# Altium PCB T1_MODIFYV1_0527.PCBDOC (part 4 of 6)
Units mm, origin at the board's own origin, x right, y up, seen from the top; angles counter-clockwise.
Board outline 1320.8 x 844.04 mm, 2 copper layers (Top Layer, Bottom Layer); 219 components, 215 nets, 1393 pads, 492 vias.
Unrouted connection lines stored in the file: 60.
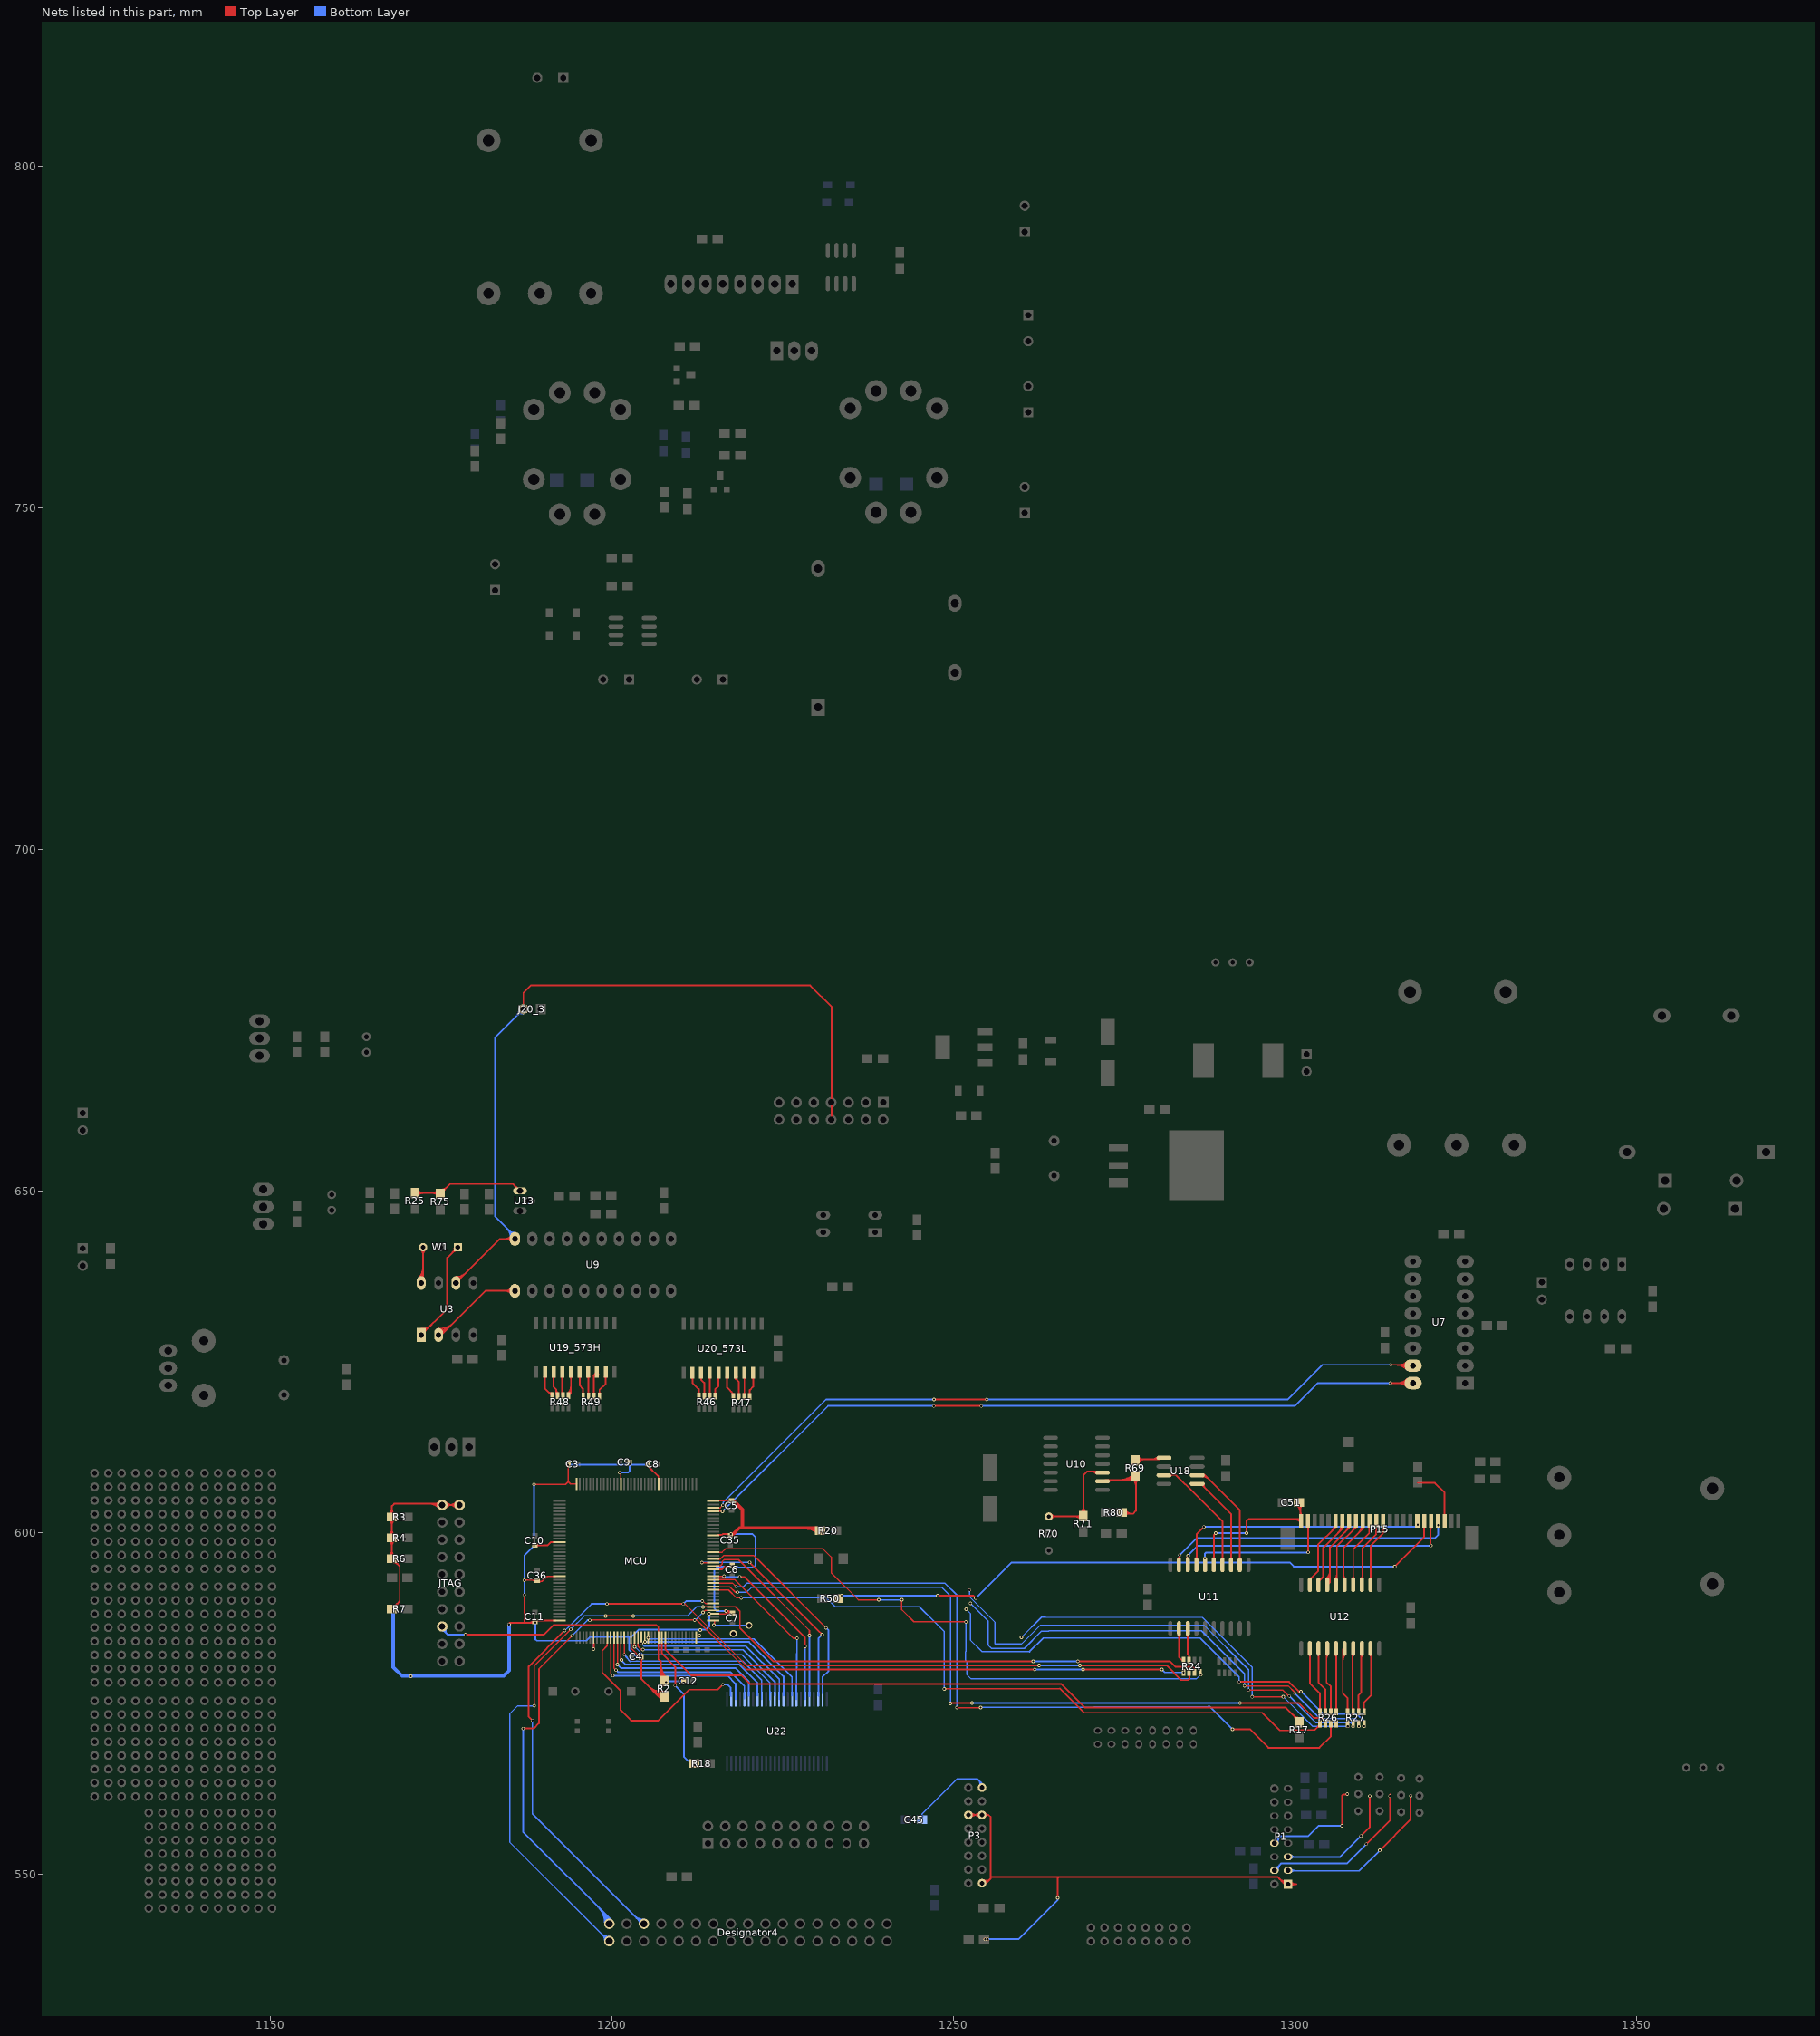
[diagram p4: the nets of this part, all layers, seen from the top]

## Via types
v1: diameter 0.5, hole 0.3, Top Layer to Bottom Layer, 470 vias
v2: diameter 0.8, hole 0.5, Top Layer to Bottom Layer, 12 vias
v3: diameter 3, hole 1.5, Top Layer to Bottom Layer, 4 vias
v4: diameter 3, hole 3, Top Layer to Bottom Layer, 4 vias
v5: diameter 1, hole 0.7, Top Layer to Bottom Layer, 2 vias

## Nets (pads, with @x,y where several pads share a name; then routed paths per layer and width w, separated by ;. In a path a pad name is that pad's centre, name@x,y a point inside that pad or via, vN(x,y) a via of type N, cw(c..) or ccw(c..) an arc to the next point about the centre after c; other vN are vias at no path point) (continued)
NetR24_7: R24.7 U11.3 | length 6
  Top Layer w0.254: U11.3@1284.127,585.13 cw(c1283.862,584.864) 1284.237,584.864 ; 1284.237,584.804 cw(c1284.697,584.804) U11.3@1284.372,585.13 ; U11.3@1284.237,586.154 1284.237,582.236 1284.453,582.02 R24.7@1284.453,581.355 ; R24.7@1284.366,581.692 ccw(c1284.156,581.902) 1284.453,581.902 ccw(c1284.75,581.902) R24.7@1284.54,581.692
NetR24_8: R24.8 U11.2 | length 6
  Top Layer w0.254: U11.2@1282.857,585.13 cw(c1282.592,584.864) 1282.967,584.864 ; 1282.967,584.804 cw(c1283.427,584.804) U11.2@1283.102,585.13 ; U11.2@1282.967,586.154 1282.967,581.838 R24.8@1283.704,581.101
NetR25_2: R25.2 R75.1 U13.1 | length 24.3
  Top Layer w0.254: R25.2@1171.143,649.757 R75.1@1174.699,649.757 ; R25.2@1171.502,649.398 cw(c1172.37,648.531) 1172.37,649.757 cw(c1172.37,650.984) R25.2@1171.502,650.117 ; R75.1@1174.467,649.398 ccw(c1173.6,648.531) 1173.6,649.757 ccw(c1173.6,650.984) R75.1@1174.467,650.117 ; R75.1@1174.826,649.63 1176.274,651.078 1185.491,651.078 U13.1@1186.485,650.084 ; R75.1@1174.826,650.011 ccw(c1174.826,650.931) 1175.477,650.281 ; R75.1@1174.826,650.265 ccw(c1174.826,651.798) 1175.91,650.714 ; R75.1@1175.334,649.757 cw(c1176.254,649.757) 1175.604,650.408 ; 1185.588,650.981 cw(c1184.88,650.273) U13.1@1185.867,650.104 ; 1185.936,650.633 cw(c1185.474,650.171) U13.1@1186.118,650.062
NetR26_5: R26.5 U12.5 | length 9.7
  Top Layer w0.254: U12.5@1305.819,582.209 cw(c1305.462,581.852) 1305.966,581.852 ; R26.5@1305.966,573.875 U12.5@1305.966,582.625 ; 1305.966,574.475 ccw(c1306.392,574.475) R26.5@1306.091,574.174 ; 1305.966,581.975 cw(c1306.297,581.975) U12.5@1306.063,582.209
NetR26_6: R26.6 U12.4 | length 10.1
  Top Layer w0.254: 1304.569,581.668 cw(c1305.334,581.668) U12.4@1304.793,582.209 ; U12.4@1304.569,582.651 1304.569,578.155 1305.204,577.52 R26.6@1305.204,573.837 ; R26.6@1305.117,574.174 ccw(c1304.907,574.384) 1305.204,574.384 ccw(c1305.501,574.384) R26.6@1305.291,574.174
NetR26_7: R26.7 U12.3 | length 10
  Top Layer w0.254: U12.3@1303.279,582.209 cw(c1302.983,581.913) 1303.401,581.913 ; 1303.401,581.913 cw(c1303.819,581.913) U12.3@1303.523,582.209 ; U12.3@1303.401,582.473 1303.401,578.104 1304.392,577.113 R26.7@1304.392,574.04 ; R26.7@1304.317,574.174 ccw(c1304.138,574.353) 1304.392,574.353 ; 1304.392,574.414 ccw(c1304.732,574.414) R26.7@1304.491,574.174
NetR26_8: R26.8 U12.2 | length 10.4
  Top Layer w0.254: U12.2@1302.009,582.209 cw(c1301.713,581.913) 1302.131,581.913 ; 1302.131,581.913 cw(c1302.549,581.913) U12.2@1302.253,582.209 ; U12.2@1302.131,582.524 1302.131,578.028 1303.604,576.555 R26.8@1303.604,573.837 ; R26.8@1303.517,574.174 ccw(c1303.307,574.384) 1303.604,574.384 ccw(c1303.901,574.384) R26.8@1303.691,574.174
NetR27_5: R27.5 U12.9 | length 10
  Top Layer w0.254: R27.5@1309.981,574.174 ccw(c1309.801,574.354) 1310.056,574.354 ; R27.5@1310.056,574.04 1310.056,575.183 1311.097,576.224 U12.9@1311.097,582.625 ; 1310.056,574.414 ccw(c1310.395,574.414) R27.5@1310.155,574.174 ; U12.9@1310.899,582.209 cw(c1310.419,581.729) 1311.097,581.729
NetR27_6: R27.6 U12.8 | length 10.3
  Top Layer w0.254: R27.6@1309.181,574.174 ccw(c1308.971,574.384) 1309.268,574.384 ccw(c1309.565,574.384) R27.6@1309.355,574.174 ; R27.6@1309.268,573.837 1309.268,576.275 1309.649,576.656 U12.8@1309.649,582.93 ; 1309.649,581.668 cw(c1310.414,581.668) U12.8@1309.873,582.209
NetR27_7: R27.7 U12.7 | length 9.9
  Top Layer w0.254: R27.7@1308.379,573.862 U12.7@1308.379,582.701 ; 1308.379,574.598 ccw(c1308.98,574.598) R27.7@1308.555,574.174 ; 1308.379,581.668 cw(c1309.144,581.668) U12.7@1308.603,582.209
NetR27_8: R27.8 U12.6 | length 11.5
  Top Layer w0.254: 1306.957,581.3 cw(c1308.242,581.3) U12.6@1307.333,582.209 ; 1306.957,581.913 cw(c1307.629,581.913) U12.6@1307.154,582.388 ; U12.6@1306.957,582.527 cw(c1307.015,582.527) U12.6@1306.974,582.568 ; U12.6@1306.957,583.032 1306.957,576.529 1307.668,575.818 R27.8@1307.668,573.837 ; R27.8@1307.581,574.174 ccw(c1307.371,574.384) 1307.668,574.384 ccw(c1307.965,574.384) R27.8@1307.755,574.174
NetR46_5: R46.5 U20_573L.5 | length 4.7
  Top Layer w0.254: R46.5@1214.985,620.376 ccw(c1214.775,620.586) 1215.072,620.586 ccw(c1215.369,620.586) R46.5@1215.159,620.376 ; R46.5@1215.072,620.039 1215.072,621.055 1215.542,621.526 U20_573L.5@1215.542,623.449 ; U20_573L.5@1215.42,622.777 cw(c1215.125,622.482) 1215.542,622.482 cw(c1215.96,622.482) U20_573L.5@1215.665,622.777
NetR46_6: R46.6 U20_573L.4 | length 4.5
  Top Layer w0.254: U20_573L.4@1214.15,622.777 cw(c1213.855,622.482) 1214.272,622.482 cw(c1214.69,622.482) U20_573L.4@1214.395,622.777 ; R46.6@1214.185,620.376 ccw(c1213.975,620.587) 1214.272,620.587 ; R46.6@1214.272,620.039 U20_573L.4@1214.272,623.449 ; 1214.272,620.586 ccw(c1214.569,620.586) R46.6@1214.359,620.376
NetR46_7: R46.7 U20_573L.3 | length 4.7
  Top Layer w0.254: U20_573L.3@1212.88,622.777 cw(c1212.585,622.482) 1213.002,622.482 cw(c1213.42,622.482) U20_573L.3@1213.125,622.777 ; U20_573L.3@1213.002,623.449 1213.002,622.452 1213.472,621.983 R46.7@1213.472,620.039 ; R46.7@1213.385,620.376 ccw(c1213.175,620.586) 1213.472,620.586 ccw(c1213.769,620.586) R46.7@1213.559,620.376
NetR46_8: R46.8 U20_573L.2 | length 4.9
  Top Layer w0.254: U20_573L.2@1211.61,622.777 cw(c1211.315,622.482) 1211.732,622.482 cw(c1212.15,622.482) U20_573L.2@1211.855,622.777 ; U20_573L.2@1211.732,623.449 1211.732,621.995 1212.672,621.055 R46.8@1212.672,620.039 ; R46.8@1212.585,620.376 ccw(c1212.375,620.586) 1212.672,620.586 ccw(c1212.969,620.586) R46.8@1212.759,620.376
NetR47_5: R47.5 U20_573L.9 | length 4.8
  Top Layer w0.254: R47.5@1220.04,620.3 ccw(c1219.83,620.51) 1220.127,620.51 ccw(c1220.424,620.51) R47.5@1220.214,620.3 ; R47.5@1220.127,619.963 1220.127,620.928 1220.622,621.424 U20_573L.9@1220.622,623.449 ; U20_573L.9@1220.5,622.777 cw(c1220.205,622.482) 1220.622,622.482 cw(c1221.04,622.482) U20_573L.9@1220.745,622.777
NetR47_6: R47.6 U20_573L.8 | length 4.4
  Top Layer w0.254: U20_573L.8@1219.23,622.777 cw(c1218.935,622.482) 1219.352,622.482 cw(c1219.77,622.482) U20_573L.8@1219.475,622.777 ; R47.6@1219.24,620.3 ccw(c1218.968,620.572) 1219.352,620.572 ; R47.6@1219.352,619.963 U20_573L.8@1219.352,623.449
NetR47_7: R47.7 U20_573L.7 | length 6.1
  Top Layer w0.254: U20_573L.7@1218.007,622.93 ccw(c1218.329,622.799) 1218.084,622.553 ; U20_573L.7@1218.082,623.449 1218.082,622.554 ; U20_573L.7@1218.243,622.834 ccw(c1218.714,622.642) 1218.354,622.282 ; R47.7@1218.44,620.3 ccw(c1218.23,620.51) 1218.527,620.51 ccw(c1218.824,620.51) R47.7@1218.614,620.3 ; R47.7@1218.527,619.963 1218.527,622.11 1218.082,622.554 ; 1218.082,622.554 ccw(c1217.824,622.554) 1217.979,622.761 cw(c1217.824,622.554) 1218.082,622.554 ; 1218.082,622.554 cw(c1218.341,622.554) 1218.186,622.761 ccw(c1218.341,622.554) 1218.082,622.554
NetR47_8: R47.8 U20_573L.6 | length 4.7
  Top Layer w0.254: U20_573L.6@1216.69,622.777 cw(c1216.395,622.482) 1216.812,622.482 cw(c1217.23,622.482) U20_573L.6@1216.935,622.777 ; U20_573L.6@1216.812,623.449 1216.812,621.284 R47.8@1217.778,620.319 ; 1217.406,620.69 cw(c1216.929,620.213) R47.8@1217.604,620.213
NetR48_5: R48.5 U19_573H.5 | length 6.6
  Top Layer w0.254: R48.5@1193.497,620.427 ccw(c1192.397,621.527) 1193.952,621.527 ; R48.5@1193.584,620.09 1193.952,620.459 ; R48.5@1193.658,620.438 ccw(c1193.793,620.618) 1193.952,620.459 ; R48.5@1193.676,620.248 ccw(c1193.01,620.914) 1193.952,620.914 ; U19_573H.5@1193.83,622.879 cw(c1193.535,622.583) 1193.952,622.583 cw(c1194.37,622.583) U19_573H.5@1194.075,622.879 ; U19_573H.5@1193.952,623.551 1193.952,620.459
NetR48_6: R48.6 U19_573H.4 | length 4.7
  Top Layer w0.254: U19_573H.4@1192.56,622.879 cw(c1192.265,622.583) 1192.682,622.583 cw(c1193.1,622.583) U19_573H.4@1192.805,622.879 ; 1192.682,620.882 ccw(c1193.326,620.882) R48.6@1192.871,620.427 ; U19_573H.4@1192.682,623.551 1192.682,620.192 R48.6@1192.784,620.09
NetR48_7: R48.7 U19_573H.3 | length 5
  Top Layer w0.254: U19_573H.3@1191.29,622.879 cw(c1190.995,622.583) 1191.412,622.583 cw(c1191.83,622.583) U19_573H.3@1191.535,622.879 ; U19_573H.3@1191.412,623.551 1191.412,621.374 1191.815,620.971 ; R48.7@1191.984,620.09 1191.815,620.259 1191.815,620.971 ; R48.7@1192.063,620.434 cw(c1192.52,620.971) 1191.815,620.971
NetR48_8: R48.8 U19_573H.2 | length 5.3
  Top Layer w0.254: U19_573H.2@1190.02,622.879 cw(c1189.725,622.583) 1190.142,622.583 cw(c1190.56,622.583) U19_573H.2@1190.265,622.879 ; U19_573H.2@1190.142,623.551 1190.142,621.132 R48.8@1191.184,620.09 ; 1190.547,620.727 ccw(c1191.184,621.364) R48.8@1191.184,620.463
NetR49_5: R49.5 U19_573H.9 | length 5
  Top Layer w0.254: R49.5@1198.043,620.402 ccw(c1197.833,620.612) 1198.13,620.612 ccw(c1198.427,620.612) R49.5@1198.217,620.402 ; R49.5@1198.13,620.065 1198.13,620.954 1199.032,621.856 U19_573H.9@1199.032,623.551 ; U19_573H.9@1198.91,622.879 cw(c1198.615,622.583) 1199.032,622.583 cw(c1199.45,622.583) U19_573H.9@1199.155,622.879
NetR49_6: R49.6 U19_573H.8 | length 5.2
  Top Layer w0.254: 1197.237,623.025 cw(c1197.547,622.715) U19_573H.8@1197.811,623.066 ; R49.6@1197.305,620.065 1197.305,623.094 U19_573H.8@1197.762,623.551 ; 1197.305,620.673 ccw(c1197.688,620.673) R49.6@1197.417,620.402 ; 1197.444,623.232 cw(c1197.725,622.951) U19_573H.8@1197.964,623.269
NetR49_7: R49.7 U19_573H.7 | length 4.5
  Top Layer w0.254: U19_573H.7@1196.37,622.879 cw(c1196.075,622.583) 1196.492,622.583 cw(c1196.91,622.583) U19_573H.7@1196.615,622.879 ; R49.7@1196.492,620.065 U19_573H.7@1196.492,623.551 ; 1196.492,620.704 ccw(c1196.919,620.704) R49.7@1196.617,620.402
NetR49_8: R49.8 U19_573H.6 | length 4.9
  Top Layer w0.254: U19_573H.6@1195.1,622.879 cw(c1194.805,622.583) 1195.222,622.583 cw(c1195.64,622.583) U19_573H.6@1195.345,622.879 ; U19_573H.6@1195.222,623.551 1195.222,621.614 1195.705,621.132 R49.8@1195.705,619.76 ; 1195.705,620.673 ccw(c1196.089,620.673) R49.8@1195.817,620.402
NetR69_1: R69.1 U18.5 | length 7.6
  Top Layer w0.254: R69.1@1276.756,610.794 1280.211,610.794 U18.5@1280.465,611.048 ; R69.1@1276.784,610.563 cw(c1277.34,610.007) 1277.34,610.794 ; R69.1@1276.963,610.384 cw(c1277.953,609.394) 1277.953,610.794 ; R69.1@1276.963,611.102 ccw(c1277.708,611.847) 1277.708,610.794 ; 1279.075,610.794 ccw(c1279.075,611.905) U18.5@1279.861,611.119 ; 1279.688,610.794 ccw(c1279.688,611.292) U18.5@1280.04,610.94
NetR69_2: R69.2 R80.1 U10.2 | length 23
  Top Layer w0.254: U10.2@1272.184,607.771 1276.833,607.771 1276.68,607.619 1276.68,603.25 1276.223,602.793 ; U10.2@1272.486,607.625 cw(c1272.838,607.273) 1272.838,607.771 ; U10.2@1272.665,607.446 cw(c1273.451,606.66) 1273.451,607.771 ; 1274.335,607.771 ccw(c1274.335,610.472) R69.2@1276.245,608.562 ; R80.1@1274.496,602.793 1276.223,602.793 ; R80.1@1274.894,603.159 ccw(c1275.679,603.817) 1275.679,602.793 ; 1274.948,607.771 ccw(c1274.948,609.859) R69.2@1276.424,608.383 ; R80.1@1275.058,602.637 cw(c1275.435,602.26) 1275.435,602.793 ; R80.1@1275.088,603.322 ccw(c1276.223,604.273) 1276.223,602.793 ; 1275.562,607.771 ccw(c1275.562,609.245) R69.2@1276.604,608.203 ; R69.2@1276.245,607.844 cw(c1275.194,606.793) 1276.68,606.793 ; R69.2@1276.424,608.023 cw(c1275.807,607.406) 1276.68,607.406 ; 1276.68,607.161 cw(c1277.646,607.161) R69.2@1276.963,607.844
NetR70_3: R70.2 R71.1 U10.3 | length 20.1
  Top Layer w0.25: R70.2@1263.904,602.408 R71.1@1268.556,602.408 ; R70.2@1264.24,602.072 cw(c1265.051,601.261) 1265.051,602.408 cw(c1265.051,603.555) R70.2@1264.24,602.744 ; 1267.639,602.408 cw(c1267.639,601.016) R71.1@1268.623,602 ; 1267.866,602.408 ccw(c1267.866,603.479) R71.1@1268.623,602.722 ; 1268.243,602.408 cw(c1268.243,601.62) R71.1@1268.8,602.177 ; R71.1@1268.623,602.976 ccw(c1267.753,603.846) 1268.984,603.846 ccw(c1270.215,603.846) R71.1@1269.345,602.976 ; R71.1@1268.984,602.488 1268.984,608.457 1269.517,608.99 U10.3@1271.168,608.99 ; 1270.203,608.99 cw(c1270.203,608.048) U10.3@1270.869,608.714
NetU3_1: U3.1 W1.1 | length 20.7
  Top Layer w0.254: U3.1@1172.032,628.98 1175.842,632.79 1175.842,640.283 W1.1@1177.392,641.833 ; U3.1@1172.032,629.361 ccw(c1172.032,630.281) 1172.683,629.631 ; U3.1@1172.032,629.615 ccw(c1172.032,631.148) 1173.116,630.064 ; U3.1@1172.032,629.869 ccw(c1172.032,632.015) 1173.55,630.498 ; U3.1@1172.54,629.361 cw(c1172.847,629.361) U3.1@1172.63,629.578 ; W1.1@1176.919,641.833 cw(c1175.777,641.833) 1176.584,641.025 cw(c1177.392,640.218) W1.1@1177.392,641.36
NetU3_2: U3.2 U9.1 | length 24.6
  Top Layer w0.254: U3.2@1174.572,628.98 1174.979,628.98 1181.43,635.432 U9.1@1185.748,635.432 ; U3.2@1174.572,629.107 ccw(c1174.572,630.395) 1175.483,629.484 ; U3.2@1174.572,629.361 ccw(c1174.572,631.262) 1175.916,629.918 ; U3.2@1174.572,629.615 ccw(c1174.572,632.129) 1176.35,630.352 ; U3.2@1174.572,629.869 ccw(c1174.572,632.997) 1176.784,630.785 ; U9.1@1185.299,634.983 ccw(c1184.215,633.899) 1184.215,635.432 ccw(c1184.215,636.965) U9.1@1185.299,635.881 ; U9.1@1185.479,635.162 ccw(c1184.828,634.512) 1184.828,635.432 ccw(c1184.828,636.352) U9.1@1185.479,635.701
NetU3_8: U3.8 W1.3 | length 10.8
  Top Layer w0.254: U3.8@1171.673,637.34 ccw(c1170.131,638.882) 1172.312,638.882 ; U3.8@1171.853,637.161 ccw(c1170.744,638.269) 1172.312,638.269 ; W1.3@1171.977,641.498 cw(c1171.17,640.691) 1172.312,640.691 cw(c1173.454,640.691) W1.3@1172.646,641.498 ; U3.8@1172.032,636.6 1172.312,636.88 W1.3@1172.312,641.833 ; U3.8@1172.032,636.981 ccw(c1171.358,637.656) 1172.312,637.656
OS_0: P1.3 | length 25.7
  Top Layer w0.254: v1(1312.367,553.542) 1316.863,558.038 v1@1316.863,561.492
  Bottom Layer w0.254: P1.3@1299.134,550.545 1309.37,550.545 v1(1312.367,553.542) ; P1.3@1299.329,550.325 cw(c1299.859,549.795) 1299.859,550.545 ; P1.3@1299.329,550.853 ccw(c1300.073,551.596) 1300.073,550.545
  other v1: 1316.903,561.532
OS_1: P1.4 | length 25.7
  Top Layer w0.254: v1(1310.411,554.457) 1313.866,557.911 v1@1313.866,561.696
  Bottom Layer w0.254: P1.4@1296.931,550.589 1296.931,550.628 1297.915,551.612 1307.567,551.612 v1(1310.411,554.457) ; P1.4@1297.066,550.962 ccw(c1297.066,551.444) 1297.406,551.103 ; P1.4@1297.185,550.589 cw(c1297.891,550.589) 1297.392,551.089 ; P1.4@1297.439,550.589 cw(c1298.758,550.589) 1297.825,551.522
  other v1: 1313.866,561.492
OS_2: P1.5 | length 19.8
  Top Layer w0.254: v1(1309.624,555.65) 1310.919,556.946 v1@1310.919,561.492
  Bottom Layer w0.254: P1.5@1298.931,552.589 1306.563,552.589 v1(1309.624,555.65) ; P1.5@1299.329,552.325 cw(c1299.966,551.689) 1299.966,552.589 cw(c1299.966,553.49) P1.5@1299.329,552.853
  other v1: 1310.894,561.492
PB0: MCU.46 R26.1 | length 102.4
  Top Layer w0.2: MCU.46@1215.492,591.642 1217.041,591.642 1218.184,590.499 v1(1218.895,590.499)
  Top Layer w0.254: v1(1248.613,577.164) 1265.504,577.24 1269.06,573.684 1295.171,573.684 1297.762,571.094 1299.54,571.094 1299.616,571.17 1302.817,571.17 R26.1@1303.426,571.779 ; 1303.141,571.494 cw(c1303.604,571.031) R26.1@1303.604,571.686
  Bottom Layer w0.2: v1(1218.895,590.499) 1231.341,590.499 1232.637,589.204 1244.956,589.204 1246.022,588.137 ; 1245.916,588.264 1248.628,585.542 v1(1248.613,577.164)
PB0_Y: P15.6 U12.19 | length 11
  Top Layer w0.254: U12.19@1302.131,593.354 ccw(c1302.131,593.746) 1302.408,593.469 ; U12.19@1302.207,593.268 1303.325,594.385 1303.325,598.272 1305.814,600.761 P15.6@1305.814,601.269 ; U12.19@1302.304,593.181 cw(c1302.747,593.181) 1302.434,593.494 ; 1305.394,600.341 ccw(c1304.674,601.06) P15.6@1305.692,601.06
PB1: MCU.47 R26.2 | length 107.4
  Top Layer w0.2: MCU.47@1215.466,592.099 1217.244,592.099 1218.032,591.312 v1(1218.311,591.312) ; 1300.531,575.107 1302.715,572.922 1304.011,572.922 1304.404,572.529 R26.2@1304.404,572.059
  Top Layer w0.254: v1(1249.502,575.031) 1249.578,575.107 v1(1252.677,575.107) ; v1(1291.895,575.107) 1300.531,575.107
  Bottom Layer w0.2: v1(1218.311,591.312) 1219.657,591.312 1220.368,592.023 1248.258,592.023 1249.528,590.753 v1@1249.528,575.031
  Bottom Layer w0.254: v1(1252.677,575.107) v1(1291.895,575.107)
PB1_Y: P15.7 U12.18 | length 13
  Top Layer w0.254: U12.18@1303.354,592.849 ccw(c1303.356,592.867) U12.18@1303.369,592.854 ; U12.18@1303.39,593.101 ccw(c1303.446,593.495) 1303.728,593.213 ; U12.18@1303.425,593.352 ccw(c1303.536,594.124) 1304.087,593.573 ; U12.18@1303.426,592.912 1304.087,593.573 ; 1306.257,600.01 ccw(c1305.206,601.06) P15.7@1306.692,601.06 ; 1306.69,600.443 ccw(c1306.074,601.06) P15.7@1306.946,601.06 ; P15.7@1306.79,600.904 cw(c1306.682,600.679) 1306.932,600.679 ; P15.7@1306.932,601.193 1306.932,600.685 1304.087,597.84 1304.087,593.573
PB2: MCU.48 R26.3 | length 112.9
  Top Layer w0.2: MCU.48@1215.466,592.684 1217.6,592.684 v1(1218.159,592.125) ; v1@1250.442,574.429 1250.467,574.429 v1(1253.922,574.446)
  Top Layer w0.254: v1(1290.803,571.271) 1293.343,571.271 1296.06,568.554 1303.528,568.554 1305.204,570.23 R26.3@1305.204,572.059 ; R26.3@1305.117,571.722 cw(c1304.907,571.512) 1305.204,571.512 cw(c1305.501,571.512) R26.3@1305.291,571.722
  Bottom Layer w0.2: v1(1218.159,592.125) 1219.2,592.125 1219.733,592.658 1248.715,592.658 1250.442,590.931 v1@1250.442,574.446
  Bottom Layer w0.254: v1(1253.922,574.446) 1287.221,574.596 1287.478,574.596 v1(1290.803,571.271)
  other v1: 1250.467,574.446
PB2_Y: P15.8 U12.17 | length 15
  Top Layer w0.254: U12.17@1304.549,593.303 ccw(c1303.272,594.58) 1305.077,594.58 ; U12.17@1304.671,592.406 1305.077,592.812 1305.077,597.916 1307.846,600.685 ; U12.17@1304.728,593.124 ccw(c1303.885,593.967) 1305.077,593.967 ; U12.17@1304.908,592.944 ccw(c1304.499,593.353) 1305.077,593.353 ; 1307.317,600.156 ccw(c1306.413,601.06) P15.8@1307.692,601.06 ; P15.8@1307.742,600.938 cw(c1307.493,600.688) 1307.846,600.688 ; 1307.751,600.59 ccw(c1307.28,601.06) P15.8@1307.946,601.06 ; P15.8@1307.846,601.243 1307.846,600.685 ; P15.8@1307.966,600.92 ccw(c1308.137,600.684) 1307.846,600.684
PB3: R26.4 | length 0.3
  Top Layer w0.254: R26.4@1306.004,571.742 R26.4@1306.004,572.059
PB3_Y: P15.9 U12.16 | length 11.8
  Top Layer w0.254: U12.16@1305.819,593.303 ccw(c1305.149,593.973) 1306.096,593.973 ; U12.16@1306.096,592.204 1306.096,598.071 1308.913,600.888 P15.9@1308.913,601.396 ; 1308.414,600.389 ccw(c1307.743,601.06) P15.9@1308.692,601.06
PB4: R27.1 | length 58.1
  Top Layer w0.2: v1(1293.698,576.021) v1(1298.245,576.021)
  Bottom Layer w0.2: v1(1259.916,584.733) 1262.863,587.68 1263.421,587.68 1286.434,587.604 1293.698,580.339 v1(1293.698,576.021) ; v1(1298.245,576.021) 1302.563,571.703 v1(1307.694,571.703)
PB4_Y: P15.10 U12.15 | length 12.6
  Top Layer w0.254: U12.15@1307.033,592.584 1307.033,597.789 1309.929,600.685 P15.10@1309.929,601.04 ; 1307.033,594.028 ccw(c1308.058,594.028) U12.15@1307.333,593.303 ; 1309.259,600.015 ccw(c1308.213,601.06) P15.10@1309.692,601.06 ; 1309.692,600.448 ccw(c1309.081,601.06) P15.10@1309.946,601.06 ; P15.10@1309.788,600.905 cw(c1309.677,600.679) 1309.929,600.679
PB5: R27.2 | length 71.6
  Top Layer w0.2: v1(1293.165,576.986) 1298.194,576.986 1299.045,576.135 v1(1299.121,576.135) ; v1@1298.948,576.232 ccw(c1299.121,576.405) v1@1299.121,576.16
  Bottom Layer w0.2: v1(1252.296,591.668) 1252.296,590.677 1256.005,586.969 1256.005,583.743 1259.916,583.743 1262.685,586.511 1286.637,586.511 1293.165,579.984 v1(1293.165,576.986) ; v1(1299.121,576.135) 1303.02,572.237 1308.1,572.237 1308.456,571.881 v1(1308.456,571.703) ; 1308.287,572.049 cw(c1307.941,571.703) v1@1308.431,571.703
PB5_Y: P15.11 U12.14 | length 10.9
  Top Layer w0.254: U12.14@1308.359,593.303 ccw(c1308.063,593.599) 1308.481,593.599 ccw(c1308.899,593.599) U12.14@1308.603,593.303 ; U12.14@1308.481,592.406 1308.481,597.611 1310.818,599.948 P15.11@1310.818,600.989 ; P15.11@1310.742,600.938 cw(c1310.561,600.756) 1310.818,600.756 ; 1310.818,600.529 cw(c1311.396,600.529) P15.11@1310.987,600.938
PB6: R27.3 | length 70.6
  Top Layer w0.2: v1(1292.555,577.621) 1298.981,577.621 1299.921,576.682 v1(1299.921,576.529) ; 1299.771,576.832 cw(c1299.468,576.529) v1@1299.896,576.529
  Bottom Layer w0.2: v1(1252.449,589.712) 1255.014,587.146 1255.014,583.616 1255.522,583.108 1260.323,583.108 1262.837,585.622 1263.929,585.622 ; 1263.929,585.699 1286.256,585.699 1292.555,579.399 v1(1292.555,577.621) ; v1(1299.921,576.529) 1303.299,573.151 1303.299,572.821 1308.862,572.821 1309.319,572.364 v1(1309.319,571.703)
PB6_Y: P15.12 U12.13 | length 10.3
  Top Layer w0.254: U12.13@1309.629,593.303 ccw(c1309.149,593.783) 1309.827,593.783 ; U12.13@1309.827,592.912 1309.827,597.687 ; 1309.827,597.764 1311.808,599.745 P15.12@1311.808,601.497 ; 1311.808,600.506 cw(c1312.419,600.506) P15.12@1311.987,600.938
PB7: R27.4 | length 70.4
  Top Layer w0.254: v1(1291.768,578.206) 1299.077,578.206 1300.5,576.783 v1(1300.836,576.783) ; R27.4@1310.068,571.792 R27.4@1310.068,572.059
  Bottom Layer w0.2: v1(1251.814,588.848) 1252.423,588.239 1252.423,584.327 1254.125,582.625 1261.085,582.625
  Bottom Layer w0.254: 1261.085,582.625 1263.091,584.632 1264.945,584.632 1286.104,584.581 1291.768,578.917 v1(1291.768,578.206) ; v1(1300.836,576.783) 1304.112,573.507 1309.014,573.507 1310.056,572.465 v1(1310.056,571.729)
PB7_Y: P15.13 U12.12 | length 10.9
  Top Layer w0.254: U12.12@1310.899,593.303 ccw(c1310.603,593.599) 1311.021,593.599 ccw(c1311.439,593.599) U12.12@1311.143,593.303 ; U12.12@1311.021,592.406 1311.021,598.094 1312.875,599.948 P15.13@1312.875,601.243 ; P15.13@1312.742,600.938 cw(c1312.422,600.617) 1312.875,600.617 ; 1312.875,600.667 cw(c1313.257,600.667) P15.13@1312.987,600.938
PF0: MCU.10 U22.26 | length 31.5
  Top Layer w0.2: 1198.55,579.577 1198.55,582.778 1199.261,583.489 MCU.10@1199.261,583.971
  Top Layer w0.254: 1198.55,579.577 1201.242,576.885 1201.242,574.065 1202.766,572.541 1206.754,572.541 1211.275,577.063 1215.441,577.063 v1@1216.025,577.647
  Bottom Layer w0.254: v1@1216.152,577.825 v1(1216.177,577.799) 1216.889,577.799 1217.346,577.342 1217.346,576.174 U22.26@1217.422,576.097
PF1: MCU.11 U22.27 | length 25.4
  Top Layer w0.2: 1199.769,583.768 1199.769,579.45 v1(1200.099,579.12)
  Bottom Layer w0.254: v1@1200.175,579.095 1216.914,579.095 1218.057,577.952 U22.27@1218.057,575.666
PF2: MCU.12 U22.29 | length 25.9
  Top Layer w0.2: MCU.12@1200.226,583.997 1200.226,580.238 v1(1200.556,579.907)
  Bottom Layer w0.254: v1(1200.556,579.907) 1200.836,579.628 1217.32,579.628 1219.352,577.596 U22.29@1219.352,575.691
PF3: MCU.13 U22.30 | length 25.4
  Top Layer w0.2: v1(1200.76,580.746) MCU.13@1200.76,583.844
  Bottom Layer w0.254: v1(1200.76,580.746) 1201.268,580.238 1218.006,580.238 1219.987,578.256 U22.30@1219.987,576.199
PF4: MCU.14 U22.32 | length 25.6
  Top Layer w0.2: v1@1201.268,581.406 MCU.14@1201.268,583.844
  Bottom Layer w0.254: v1(1201.344,581.406) 1202.004,580.746 1218.59,580.746 1221.257,578.079 U22.32@1221.257,576.199
PF5: MCU.15 U22.33 | length 26.3
  Top Layer w0.2: v1@1201.776,582.041 MCU.15@1201.776,583.844
  Bottom Layer w0.2: 1202.607,581.228 1219.073,581.228
  Bottom Layer w0.254: v1(1201.776,582.168) 1202.607,581.228 ; 1219.073,581.228 1221.867,578.434 U22.33@1221.867,575.615
PF6: MCU.18 U22.35 | length 25.4
  Top Layer w0.2: v1@1203.249,583.362 MCU.18@1203.249,583.921
  Bottom Layer w0.2: v1@1203.223,583.463 1204.544,582.143 1218.971,582.143 ; 1218.997,582.168 1223.061,578.104
  Bottom Layer w0.254: U22.35@1223.061,575.589 1223.061,578.104 ; 1223.061,576.925 ccw(c1223.469,576.925) U22.35@1223.18,576.636
  other v1: 1203.274,583.336
PF7: MCU.19 U22.36 | length 24.7
  Top Layer w0.2: MCU.19@1203.782,583.87 1203.782,583.393 1204.245,582.93 v1(1204.493,582.93)
  Bottom Layer w0.254: v1@1204.519,582.905 1219.149,582.905 1219.454,582.6 1219.454,582.574 1223.823,578.206 U22.36@1223.823,576.148
PF8: MCU.20 U22.37 | length 25.3
  Bottom Layer w0.2: v1(1204.265,583.844) 1204.671,583.438 1219.581,583.438
  Bottom Layer w0.254: 1219.581,583.438 1224.458,578.561 U22.37@1224.458,575.666
PF9: MCU.21 U22.38 | length 25.2
  Bottom Layer w0.254: v1(1204.798,584.048) 1220.038,584.048 1225.067,579.018 U22.38@1225.067,576.148
PF10: MCU.22 U22.40 | length 26.2
  Bottom Layer w0.2: 1205.433,584.479 1220.775,584.479
  Bottom Layer w0.254: v1@1205.255,584.657 1205.433,584.479 ; 1220.775,584.479 1226.312,578.942 U22.40@1226.312,576.148
  other v1: 1205.265,584.674
PF11: MCU.49 U22.41 | length 24.2
  Top Layer w0.2: MCU.49@1215.415,593.166 1217.955,593.166 1226.515,584.606
  Top Layer w0.254: 1226.515,584.606 v1(1227.049,584.606)
  Bottom Layer w0.254: U22.41@1226.947,575.615 1226.948,575.666 v1(1227.049,584.606)
PF12: MCU.50 U22.43 | length 25.8
  Top Layer w0.2: MCU.50@1215.542,593.674 v1(1216.355,593.674) ; v1(1218.667,593.573) 1219.327,593.573
  Top Layer w0.254: 1219.327,593.573 1228.217,584.683 v1@1228.217,583.184
  Bottom Layer w0.2: v1@1216.177,593.573 v1(1218.667,593.573)
  Bottom Layer w0.254: U22.43@1228.242,575.666 v1(1228.242,583.387)
PF13: MCU.53 U22.44 | length 28.2
  Top Layer w0.2: MCU.53@1215.161,595.173 1215.835,595.173 ; 1215.835,595.193 1216.076,595.433 1216.076,595.782 1216.406,596.113 1218.489,596.113 1228.877,585.724
  Top Layer w0.254: v1(1228.877,584.987) 1228.877,585.724
  Bottom Layer w0.254: U22.44@1228.877,576.123 v1(1228.877,584.987)
PF14: MCU.54 U22.46 | length 32.3
  Top Layer w0.2: v1(1213.104,595.655) MCU.54@1214.222,595.655
  Top Layer w0.254: v1(1220.114,595.706) 1230.147,585.699 v1(1230.732,585.14)
  Bottom Layer w0.2: v1(1213.104,595.655) 1213.151,595.706 v1(1220.114,595.706)
  Bottom Layer w0.254: U22.46@1230.173,576.174 1230.173,584.581 v1(1230.732,585.14)
PF15: MCU.55 U22.47 | length 30.6
  Top Layer w0.2: MCU.55@1215.415,596.163 1215.815,596.163 1216.348,596.697 1220.699,596.697 1221.334,596.062 ; 1221.334,596.087 v1(1231.29,586.13)
  Bottom Layer w0.254: U22.47@1230.782,576.529 1230.782,578.891 1231.671,579.78 1231.671,585.749 v1(1231.29,586.13)
RANGE: P1.8 | length 18
  Top Layer w0.254: v1(1306.83,557.124) 1306.83,561.569 1306.97,561.708 v1@1307.554,561.708
  Bottom Layer w0.254: P1.8@1296.931,554.589 1296.931,554.717 1297.813,555.6 ; P1.8@1297.184,554.596 cw(c1297.97,554.643) 1297.414,555.2 ; P1.8@1297.438,554.612 cw(c1298.724,554.689) 1297.813,555.6 ; v1(1306.83,557.124) 1303.401,557.124 1301.877,555.6 1297.813,555.6
  other v1: 1307.632,561.786
RD-OUT: MCU.27 R17.2 | length 100.9
  Top Layer w0.254: MCU.27@1207.77,584.022 1207.77,582.955 1211.555,579.171 1218.913,579.171 1220.209,577.875 1265.758,577.875 1269.213,574.421 1298.626,574.421 R17.2@1300.734,572.313 ; 1299.653,573.394 cw(c1298.699,572.44) R17.2@1300.048,572.44 ; 1299.776,573.271 ccw(c1300.556,574.052) R17.2@1300.556,572.948 ; R17.2@1300.087,572.96 cw(c1299.566,572.44) R17.2@1300.302,572.44
RD-OUT1: P15.2 U11.16 | length 21.7
  Top Layer w0.254: P15.2@1301.742,600.938 cw(c1301.447,600.642) 1301.865,600.642 cw(c1302.282,600.642) P15.2@1301.987,600.938 ; v1@1301.865,597.243 P15.2@1301.865,602.446
  Bottom Layer w0.254: v1(1286.764,596.29) 1286.764,596.976 1286.942,597.154 v1(1301.877,597.154)
READ: MCU.57 R24.4 | length 85.5
  Top Layer w0.2: 1215.669,597.179 1216.076,597.179 1216.558,597.662 1230.859,597.662 1232.052,596.468 1232.052,594.182 1236.015,590.22 v1(1239.012,590.22) ; v1(1242.39,590.245) 1242.39,588.772 1244.143,587.019 v1(1251.775,586.994)
  Bottom Layer w0.2: v1(1239.012,590.22) v1@1242.39,590.22 ; 1251.737,582.651 1251.737,581.305 1251.895,581.147 1251.886,579.276 1252.525,578.637 1285.519,578.637 v1(1286.154,579.272) ; 1251.753,582.614 1251.753,582.651 v1(1251.775,586.994)
REF_SELECT: C45.2 P3.34 | length 17.1
  Top Layer w0.2: P3.34@1254.134,562.729 P3.34@1254.413,562.729
  Bottom Layer w0.2: C45.2@1245.125,558.529 ccw(c1244.987,558.851) 1245.337,558.851 ; C45.2@1245.337,558.038 1245.337,558.851 ; C45.2@1245.548,558.529 cw(c1245.686,558.851) 1245.337,558.851 ; 1253.453,564.044 cw(c1252.514,563.104) P3.34@1253.808,562.804 ; 1253.708,563.789 cw(c1252.928,563.008) P3.34@1254.003,562.759 ; 1253.963,563.534 cw(c1253.342,562.913) P3.34@1254.198,562.714 ; P3.34@1254.134,562.729 1254.134,563.363 1253.515,563.982 1250.467,563.982 1245.337,558.851
RESET: C12.2 JTAG.15 MCU.25 R2.1 | length 50.6
  Top Layer w0.2: 1191.436,586.562 1206.449,586.562 1206.729,586.283 MCU.25@1206.729,585.318 ; 1206.754,581.533 MCU.25@1206.754,584.098
  Top Layer w0.254: v1(1178.509,585.114) 1189.989,585.114 1191.436,586.562 ; 1206.754,581.533 1207.135,581.152 R2.1@1207.135,578.815 ; R2.1@1207.135,578.95 ccw(c1208.083,578.95) R2.1@1207.413,578.28 ; 1207.135,579.563 ccw(c1208.696,579.563) R2.1@1207.592,578.46 ; 1207.135,580.177 ccw(c1209.309,580.177) R2.1@1207.772,578.639 ; 1207.135,580.79 ccw(c1209.922,580.79) R2.1@1207.951,578.819 ; C12.2@1210.437,578.333 1210.589,578.485 ccw(c1210.91,578.164) C12.2@1210.46,578.104
  Bottom Layer w0.254: JTAG.15@1175.106,586.308 1175.106,585.953 1175.944,585.114 v1(1178.509,585.114) ; JTAG.15@1175.143,585.685 cw(c1175.143,585.13) 1175.536,585.523 ; JTAG.15@1175.456,586.113 ccw(c1175.851,585.866) 1175.522,585.537 ; JTAG.15@1175.671,585.978 ccw(c1176.129,585.692) 1175.747,585.311 ; v1@1207.897,578.153 ccw(c1207.897,578.376) v1@1208.055,578.218 ; v1(1207.897,578.155) 1207.991,578.155 1208.144,578.307 1210.259,578.307 v1(1210.462,578.104)
RFTB: J20_3.2 U3.6 U9.20 | length 129
  Top Layer w0.254: U3.6@1177.112,636.6 1183.564,643.052 U9.20@1185.748,643.052 ; U3.6@1177.112,636.981 ccw(c1177.112,637.901) 1177.763,637.251 ; U3.6@1177.112,637.235 ccw(c1177.112,638.768) 1178.196,637.684 ; U3.6@1177.112,637.489 ccw(c1177.112,639.635) 1178.63,638.118 ; U3.6@1177.62,636.981 cw(c1177.927,636.981) 1177.71,637.198 ; U9.20@1185.299,642.603 ccw(c1184.215,641.519) 1184.215,643.052 ccw(c1184.215,644.585) U9.20@1185.299,643.501 ; U9.20@1185.479,642.782 ccw(c1184.828,642.132) 1184.828,643.052 ccw(c1184.828,643.972) U9.20@1185.479,643.321 ; J20_3.2@1186.993,676.681 1186.993,679.069 1188.06,680.136 1228.979,680.136 1232.129,676.986 1232.129,660.095
  Bottom Layer w0.254: 1184.592,644.563 cw(c1183.335,643.306) U9.20@1185.113,643.306 ; 1184.838,644.318 ccw(c1185.748,645.229) U9.20@1185.748,643.941 ; 1185.026,644.13 cw(c1184.202,643.306) U9.20@1185.367,643.306 ; U9.20@1186.002,642.925 1186.002,643.153 1182.853,646.303 1182.853,672.541 J20_3.2@1186.993,676.681 ; J20_3.2@1186.37,676.681 cw(c1184.866,676.681) 1185.929,675.618 cw(c1186.993,674.554) J20_3.2@1186.993,676.058 ; J20_3.2@1186.624,676.681 cw(c1185.733,676.681) 1186.363,676.051 cw(c1186.993,675.422) J20_3.2@1186.993,676.312
RST_LCD: C51.1 P15.1 U11.15 | length 26.5
  Top Layer w0.254: U11.15@1287.937,596.224 ccw(c1287.58,596.581) 1288.085,596.581 ; U11.15@1288.085,596.214 1288.085,599.694 v1(1288.364,599.973) ; 1288.085,596.458 ccw(c1288.416,596.458) U11.15@1288.182,596.224 ; v1(1292.86,599.973) 1292.86,601.726 1293.165,602.031 P15.1@1300.81,602.031 ; 1299.793,602.031 cw(c1299.793,600.689) P15.1@1300.742,601.638 ; C51.1@1300.273,604.085 cw(c1299.099,602.911) 1300.759,602.911 ; 1300.407,602.031 cw(c1300.407,601.302) P15.1@1300.922,601.817 ; C51.1@1300.453,604.264 cw(c1299.713,603.524) 1300.759,603.524 cw(c1301.552,603.524) C51.1@1300.992,604.085 ; C51.1@1300.505,604.444 1300.759,604.19 1300.759,602.234 P15.1@1300.988,602.005 ; 1300.759,603.132 ccw(c1301.537,603.132) P15.1@1300.987,602.582
  Bottom Layer w0.254: v1(1288.364,599.973) v1(1292.86,599.973)
SN_OE: MCU.26 R18.2 | length 20.2
  Top Layer w0.254: MCU.26@1207.262,583.957 1207.262,582.371 1209.218,580.415 v1(1209.218,577.672)
  Bottom Layer w0.254: v1@1209.154,577.71 1210.488,576.377 1210.488,567.284 1211.707,566.064 v1(1212.139,566.064)
SPI1_NSS: Designator4.tcs MCU.40 R24.1 | length 155.2
  Top Layer w0.2: 1189.253,580.085 v1(1194.133,584.964) ; v1(1196.721,587.223) 1196.746,587.248 1212.393,587.248 1219.632,580.009 ; v1(1213.282,588.366) 1213.307,588.366 1213.619,588.677 1213.842,588.677 1213.858,588.693
  Top Layer w0.254: v1(1186.967,571.373) 1188.491,571.373 1189.253,572.135 1189.253,580.085 ; 1219.632,580.009 v1(1261.872,580.009) ; v1(1268.908,580.009) v1(1280.465,580.009)
  Bottom Layer w0.2: v1(1194.133,584.964) 1196.391,587.223 ; v1(1212.044,587.238) 1212.342,587.426 v1(1213.282,588.366)
  Bottom Layer w0.254: v1(1186.967,571.373) 1186.967,556.209 1199.896,543.281 Designator4.tcs@1199.896,543.128 ; 1196.391,587.223 v1(1196.721,587.223) ; 1197.907,545.27 cw(c1195.436,542.798) Designator4.tcs@1198.931,542.798 ; 1198.341,544.836 cw(c1196.303,542.798) Designator4.tcs@1199.185,542.798 ; 1198.774,544.402 cw(c1197.17,542.798) Designator4.tcs@1199.439,542.798 ; 1199.208,543.969 cw(c1198.037,542.798) Designator4.tcs@1199.693,542.798 ; v1(1261.872,580.009) v1(1268.908,580.009) ; v1(1280.465,580.009) 1280.846,579.628 v1(1283.653,579.577)
SPI1_SCK: Designator4.clk MCU.41 R24.3 | length 160
  Top Layer w0.2: v1(1188.568,574.7) 1188.568,580.523 v1(1193.924,585.879) ; v1(1199.032,587.858) v1(1203.071,587.858) ; v1(1213.282,589.178) MCU.41@1214.45,589.178
  Top Layer w0.254: MCU.41@1215.263,589.204 1218.057,589.204 1218.692,588.569 1218.692,586.105 1223.594,581.203 v1(1261.643,581.203) ; v1(1268.171,581.203) 1281.684,581.203 1282.471,580.415 1285.062,580.415 1285.244,580.233 R24.3@1285.244,579.727 ; R24.3@1285.166,579.914 ccw(c1284.976,580.104) 1285.244,580.104 ; 1285.244,580.144 ccw(c1285.57,580.144) R24.3@1285.34,579.914
  Bottom Layer w0.2: v1(1188.568,574.7) 1186.18,574.7 1184.986,573.507 1184.986,554.761 1199.515,540.233 Designator4.clk@1199.871,540.233 ; v1(1193.924,585.879) 1195.903,587.858 v1(1199.032,587.858) ; 1198.306,541.442 ccw(c1199.566,542.702) Designator4.clk@1199.566,540.92 ; 1198.49,541.258 cw(c1197.49,540.258) Designator4.clk@1198.904,540.258 ; 1198.647,541.101 ccw(c1199.566,542.019) Designator4.clk@1199.566,540.72 ; 1198.831,540.917 cw(c1198.172,540.258) Designator4.clk@1199.104,540.258 ; 1198.988,540.759 ccw(c1199.566,541.336) Designator4.clk@1199.566,540.52 ; v1(1203.071,587.858) 1210.996,587.858 1212.342,589.204 v1(1213.282,589.178)
  Bottom Layer w0.254: v1(1261.643,581.203) v1(1268.171,581.203)
SPI1_SO: Designator4.mi MCU.42 R24.2 | length 158.4
  Top Layer w0.2: 1210.64,589.636 1219.657,580.619 ; v1@1213.289,590.017 1213.62,589.686 MCU.42@1214.018,589.686
  Top Layer w0.254: 1187.755,580.493 1187.755,573.1 v1(1188.314,572.541) ; 1187.831,580.517 v1(1193.038,585.724) ; v1(1199.21,589.61) v1(1210.386,589.61) 1210.64,589.559 1210.64,589.636 ; 1219.657,580.619 v1(1262.507,580.619) ; v1(1268.451,580.619) 1281.151,580.619 1283.31,578.46 1284.326,578.46 1284.503,578.637 R24.2@1284.503,579.349 ; R24.2@1284.366,579.24 cw(c1284.034,578.908) 1284.503,578.908
  Bottom Layer w0.2: v1(1193.038,585.724) 1193.698,586.334 1196.975,589.61
  Bottom Layer w0.254: v1(1188.314,572.541) 1188.314,558.876 Designator4.mi@1204.417,542.773 ; 1196.975,589.61 v1(1199.21,589.61) ; 1203.128,544.062 ccw(c1204.646,545.579) Designator4.mi@1204.646,543.433 ; 1203.562,543.628 ccw(c1204.646,544.712) Designator4.mi@1204.646,543.179 ; 1203.741,543.448 cw(c1203.091,542.798) Designator4.mi@1204.011,542.798 ; v1(1210.386,589.61) 1210.793,590.017 v1(1213.18,590.017) ; v1(1262.507,580.619) v1(1268.451,580.619)
TSCK: P15.18 U11.17 | length 37.3
  Top Layer w0.254: U11.17@1285.397,596.224 ccw(c1285.04,596.581) 1285.545,596.581 ; U11.17@1285.545,596.138 1285.545,599.821 v1(1286.612,600.888) ; 1285.545,596.458 ccw(c1285.876,596.458) U11.17@1285.642,596.224
  Bottom Layer w0.254: v1(1286.612,600.888) 1317.6,600.888 v1(1317.93,601.218)
TSCS: P15.21 U11.19 | length 42.1
  Top Layer w0.254: U11.19@1282.857,596.224 ccw(c1282.439,596.642) v1@1283.03,596.642 ; U11.19@1283.03,595.757 v1@1283.03,596.697 ; v1@1283.03,596.63 cw(c1283.199,596.63) v1@1283.08,596.749
  Bottom Layer w0.254: v1@1283.005,596.722 1285.57,599.288 1320.495,599.288 1320.927,599.719 v1(1320.927,601.142)
  other v1: 1283.081,596.748
TSDI: P15.20 U11.18 | length 40.9
  Top Layer w0.15: U11.18@1284.122,596.214 1284.122,596.468 ; U11.18@1284.258,596.327 cw(c1284.264,596.468) 1284.122,596.468 ; v1(1284.3,596.646) 1284.122,596.468 ; P15.20@1319.706,600.901 cw(c1319.271,600.467) 1319.886,600.467 ; v1@1319.825,598.205 ccw(c1319.678,598.352) v1@1319.886,598.352 ; v1(1319.86,598.17) 1319.886,598.195 P15.20@1319.886,600.964 ; 1319.886,600.567 cw(c1320.358,600.567) P15.20@1320.024,600.901
  Bottom Layer w0.254: v1(1284.3,596.646) 1284.224,596.621 1285.748,598.145 v1@1319.86,598.145
TSDO: P15.19 R50.1 | length 92
  Top Layer w0.254: v1(1247.648,590.829) 1252.83,590.829 v1(1253.211,590.448) ; v1(1314.564,595.084) 1318.844,599.364 P15.19@1318.844,601.066 ; P15.19@1318.742,600.938 cw(c1318.497,600.692) 1318.844,600.692 ; 1318.844,600.593 cw(c1319.332,600.593) P15.19@1318.987,600.938
  Bottom Layer w0.254: v1(1233.576,590.829) v1(1247.648,590.829) ; v1(1253.211,590.448) 1258.468,595.681 1299.185,595.681 1299.782,595.084 v1(1314.564,595.084)
TSINT: P15.22 | length 8.7
  Top Layer w0.254: 1317.93,607.339 1320.444,607.339 1321.865,605.919 P15.22@1321.865,601.76
USART2_RX: MCU.37 | length 5.7
  Top Layer w0.2: v1@1214.979,586.608 1214.979,587.193 MCU.37@1214.984,587.197
  Bottom Layer w0.2: v1(1214.882,586.511) 1216.736,586.511 v5(1220.038,586.461)
USART2_TX: MCU.36 | length 5.7
  Top Layer w0.2: MCU.36@1212.291,584.987 v1(1212.799,584.987)
  Bottom Layer w0.2: v1(1212.799,584.987) v5@1217.955,584.911
  other v5: 1217.727,585.267
VB10: U11.14 U18.7 | length 18.2
  Top Layer w0.25: U18.7@1280.998,608.508 1282.497,608.508 1283.894,607.111 1283.945,607.111 1289.329,601.726 U11.14@1289.329,596.036 ; U18.7@1281.707,608.333 cw(c1282.128,607.912) 1282.128,608.508 ; U18.7@1281.707,608.581 ccw(c1281.883,608.757) 1281.883,608.508 ; U11.14@1289.206,596.226 ccw(c1288.907,596.525) 1289.329,596.525 ccw(c1289.752,596.524) U11.14@1289.453,596.226
VB11: U11.13 U18.1 | length 15.6
  Top Layer w0.254: U18.1@1286.027,607.111 1286.256,607.111 1290.625,602.742 U11.13@1290.625,595.02 ; U18.1@1286.606,607.187 ccw(c1287.635,607.187) 1286.907,606.459 ; U11.13@1290.477,596.224 ccw(c1290.12,596.581) 1290.625,596.581 ; 1290.625,596.458 ccw(c1290.956,596.458) U11.13@1290.722,596.224
VB12: U11.12 U18.2 | length 19.2
  Top Layer w0.254: U18.2@1286.18,608.406 1286.815,608.406 ; U18.2@1286.394,608.528 cw(c1286.535,608.272) 1286.742,608.479 ; U18.2@1286.433,608.284 cw(c1286.433,607.067) 1287.293,607.928 ; U18.2@1286.433,608.538 cw(c1286.433,607.934) 1286.86,608.361 ; U18.2@1286.517,608.306 cw(c1286.705,607.966) 1286.98,608.241 ; U18.2@1286.584,608.542 ccw(c1286.815,608.671) 1286.815,608.406 ; U11.12@1291.747,596.224 ccw(c1291.482,596.49) 1291.857,596.49 ; U11.12@1291.857,595.173 1291.857,603.364 1286.815,608.406 ; 1291.857,596.55 ccw(c1292.317,596.55) U11.12@1291.992,596.224
VC5: MCU.70 U7.15 | length 116.9
  Top Layer w0.2: MCU.70@1215.288,603.682 1215.822,603.682 v1(1216.203,604.063)
  Top Layer w0.254: v1(1247.115,619.531) v1(1254.836,619.531) ; v1(1313.993,624.611) U7.15@1317.422,624.611 ; 1314.681,624.611 cw(c1314.681,622.277) U7.15@1316.332,623.928 ; U7.15@1316.332,625.041 cw(c1315.294,626.079) 1315.294,624.611 cw(c1315.294,622.89) U7.15@1316.511,624.107 ; U7.15@1316.511,624.862 cw(c1315.907,625.466) 1315.907,624.611 cw(c1315.907,623.503) U7.15@1316.691,624.287
  Bottom Layer w0.2: v1(1216.203,604.063) 1216.203,604.444 1231.29,619.531
  Bottom Layer w0.254: 1231.29,619.531 v1(1247.115,619.531) ; v1(1254.836,619.531) 1298.88,619.531 1303.96,624.611 v1(1313.993,624.611)
VC6: MCU.69 U7.16 | length 114.5
  Top Layer w0.2: MCU.69@1215.314,603.174 v1@1216.046,603.174
  Top Layer w0.254: v1@1216.046,603.174 v1@1216.071,603.148 ; v1(1247.064,618.592) v1(1254.049,618.592) ; v1(1313.917,621.944) U7.16@1317.244,621.944 ; U7.16@1316.332,621.388 ccw(c1314.987,620.043) 1314.987,621.944 ccw(c1314.987,623.845) U7.16@1316.332,622.501 ; U7.16@1316.511,621.567 ccw(c1315.601,620.657) 1315.601,621.944 ccw(c1315.601,623.232) U7.16@1316.511,622.322
  Bottom Layer w0.2: v1@1216.228,603.25 1231.57,618.592
  Bottom Layer w0.254: 1231.57,618.592 v1(1247.064,618.592) ; v1(1254.049,618.592) 1299.947,618.592 1303.299,621.944 v1(1313.917,621.944)
  other v1: 1216.127,603.148
VCC: P1.1 P3.37 P3.38 P3.48 | length 87
  Top Layer w0.254: P3.37@1252.134,558.729 1255.098,558.729 ; P3.37@1252.494,558.37 cw(c1253.361,557.502) 1253.361,558.729 cw(c1253.361,559.955) P3.37@1252.494,559.088 ; P3.38@1253.775,558.37 ccw(c1252.908,557.502) 1252.908,558.729 ccw(c1252.908,559.955) P3.38@1253.775,559.088 ; P3.48@1254.236,548.962 ccw(c1254.564,549.717) 1255.147,549.135 ; P3.48@1254.337,549.195 ccw(c1254.724,550.085) 1255.411,549.398 ; P3.38@1254.554,558.442 cw(c1255.098,558.07) 1255.098,558.729 ; P3.38@1254.554,559.016 ccw(c1255.098,559.388) 1255.098,558.729 ; 1254.883,548.871 cw(c1254.405,549.35) P3.48@1254.134,548.729 1254.741,548.729 1255.411,549.398 1255.411,558.415 1255.098,558.729 ; 1255.411,549.656 1297.381,549.656 P1.1@1298.448,548.589 ; v1(1265.199,546.583) 1265.199,549.402 1265.453,549.656 ; 1297.623,549.415 ccw(c1298.511,550.303) P1.1@1298.81,549.083 ; 1297.942,549.096 ccw(c1298.637,549.791) P1.1@1298.87,548.836 ; 1298.261,548.777 ccw(c1298.762,549.278) P1.1@1298.931,548.589 ; P1.1@1299.29,548.23 cw(c1300.157,547.363) 1300.157,548.589 cw(c1300.157,549.816) P1.1@1299.29,548.948
  Bottom Layer w0.254: v1(1254.608,540.537) 1259.484,540.537 1265.199,546.252 v1(1265.199,546.583)
  other v1: 1254.963,540.537
VCC3.3: C3.2 C4.2 C5.2 C6.2 C7.2 C8.2 C9.2 C10.2 C11.2 C35.2 C36.2 JTAG.1 JTAG.2 MCU.6 MCU.17 MCU.39 MCU.52 MCU.62 MCU.72 MCU.84 MCU.95 MCU.108 MCU.121 MCU.131 MCU.144 R2.2 R3.1 R4.1 R6.1 R7.1 R20.1 | length 263.8
  Top Layer w0.2: 1190.422,593.598 1190.498,593.674 MCU.131@1191.666,593.674 ; v1(1201.09,608.838) 1201.268,608.66 MCU.95@1201.268,607.847 ; MCU.17@1202.766,583.844 1202.766,583.772 1202.746,583.751 1202.746,583.154 1203.782,582.117 C4.2@1204.036,582.117 ; MCU.39@1215.415,588.137 1215.433,588.155 1216.641,588.155 1216.763,588.277 C7.2@1217.576,588.277 ; 1217.041,588.569 1217.041,588.467 1217.092,588.518 1217.092,588.378 C7.2@1217.474,588.378
  Top Layer w0.254: R6.1@1167.38,596.573 ccw(c1166.513,597.441) 1167.74,597.441 ccw(c1168.966,597.441) R6.1@1168.099,596.573 ; R4.1@1167.38,598.903 cw(c1166.513,598.036) 1167.74,598.036 cw(c1168.966,598.036) R4.1@1168.099,598.903 ; R4.1@1167.38,599.621 ccw(c1166.513,600.489) 1167.74,600.489 ccw(c1168.966,600.489) R4.1@1168.099,599.621 ; R3.1@1167.38,601.951 cw(c1166.513,601.084) 1167.74,601.084 cw(c1168.966,601.084) R3.1@1168.099,601.951 ; R3.1@1167.38,602.669 ccw(c1166.513,603.537) 1167.74,603.537 ccw(c1168.966,603.537) R3.1@1168.099,602.669 ; R6.1@1167.74,596.214 1167.74,603.936 1168.07,604.266 1174.826,604.266 1174.979,604.114 JTAG.2@1178.23,604.114 ; R7.1@1167.867,589.356 ccw(c1167.867,590.215) 1168.474,589.608 ; R6.1@1167.867,595.706 cw(c1167.867,594.725) 1168.56,595.419 ; R7.1@1168.07,589.204 1168.883,590.017 1168.883,595.097 1168.171,595.808 R6.1@1168.146,595.808 ; R7.1@1168.121,588.848 cw(c1169.102,588.848) 1168.408,589.542 ; R6.1@1168.121,596.214 ccw(c1168.979,596.214) R6.1@1168.372,595.607 ; R7.1@1168.375,588.848 cw(c1169.969,588.848) 1168.842,589.976 ; R6.1@1168.375,596.214 ccw(c1169.846,596.214) 1168.806,595.174 ; 1173.135,604.266 cw(c1173.135,602.155) JTAG.1@1174.628,603.648 ; 1173.748,604.266 cw(c1173.748,602.768) JTAG.1@1174.807,603.827 ; 1173.993,604.266 ccw(c1173.993,605.163) JTAG.1@1174.628,604.529 ; JTAG.1@1175.404,603.827 cw(c1176.095,603.136) 1176.095,604.114 ; JTAG.1@1175.404,604.349 ccw(c1175.973,604.918) 1175.973,604.114 ; JTAG.1@1175.584,603.648 cw(c1176.708,602.523) 1176.708,604.114 ; JTAG.1@1175.584,604.529 ccw(c1176.586,605.531) 1176.586,604.114 ; 1176.043,604.114 cw(c1176.043,602.523) JTAG.2@1177.168,603.648 ; 1176.165,604.114 ccw(c1176.165,605.531) JTAG.2@1177.168,604.529 ; 1176.656,604.114 cw(c1176.656,603.136) JTAG.2@1177.347,603.827 ; 1176.779,604.114 ccw(c1176.779,604.918) JTAG.2@1177.347,604.349 ; v1@1184.883,586.614 cw(c1185.432,586.066) 1185.432,586.842 ; v1@1184.935,586.842 1188.477,586.842 C11.2@1188.668,587.032 cw(c1188.208,587.492) 1188.208,586.842 ; 1187.12,586.842 v1(1187.12,590.931) ; v1(1187.12,593.09) 1187.145,593.115 C36.2@1189.177,593.115 ; 1187.594,586.842 ccw(c1187.594,588.105) C11.2@1188.488,587.212 ; 1188.318,593.115 cw(c1188.318,592.372) C36.2@1188.844,592.898 ; 1188.502,593.115 ccw(c1188.502,593.599) C36.2@1188.844,593.257 ; v1(1188.542,607.111) 1193.19,607.111 1193.559,607.479 ; C10.2@1188.752,598.208 ccw(c1188.752,597.909) 1188.541,598.121 cw(c1188.668,598.072) C10.2@1188.668,598.208 1190.564,598.208 1190.984,598.627 MCU.121@1191.87,598.627 ; C10.2@1188.847,598.028 cw(c1189.281,597.595) 1189.281,598.208 cw(c1189.281,598.821) C10.2@1188.847,598.388 ; C11.2@1188.879,587.166 MCU.144@1191.711,587.166 ; C36.2@1189.023,593.077 ccw(c1189.514,593.568) 1189.514,592.874 ; 1189.482,592.912 1189.736,592.912 1190.422,593.598 ; C3.2@1193.379,609.905 cw(c1192.945,609.471) 1193.559,609.471 cw(c1194.172,609.471) C3.2@1193.738,609.905 ; C3.2@1193.559,610.084 1193.559,607.479 ; MCU.108@1194.757,607.174 1193.864,607.174 1193.559,607.479 ; v1@1197.28,583.006 MCU.6@1197.28,583.87 ; C4.2@1204.29,581.508 1204.29,578.587 R2.2@1207.44,575.437 ; 1205.207,577.669 ccw(c1207.592,580.054) R2.2@1207.592,576.682 ; C8.2@1205.208,609.833 cw(c1205.169,609.545) 1205.459,609.545 ; C8.2@1205.243,610.084 ccw(c1205.914,610.084) 1205.439,609.61 ; C8.2@1205.459,610.133 1205.459,609.59 1206.754,608.295 MCU.84@1206.754,607.847 ; C8.2@1205.497,610.084 ccw(c1206.781,610.084) 1205.873,609.176 ; 1205.641,577.236 ccw(c1207.592,579.187) R2.2@1207.592,576.428 ; 1206.075,576.802 ccw(c1207.592,578.32) R2.2@1207.592,576.174 ; 1206.508,576.369 ccw(c1207.592,577.453) R2.2@1207.592,575.92 ; 1206.942,575.935 ccw(c1207.592,576.585) R2.2@1207.592,575.666 ; R2.2@1207.375,575.501 ccw(c1207.592,575.718) R2.2@1207.592,575.412 ; MCU.72@1215.339,604.723 C5.2@1217.651,604.723 ; MCU.52@1215.441,594.665 1216.046,594.665 1216.477,595.097 v1(1217.625,595.097) C6.2@1217.551,595.312 ; MCU.62@1215.441,599.694 1216.046,599.694 1216.211,599.859 v1(1217.371,599.859) ; v1@1216.541,588.683 v1@1216.738,588.683 ; v1(1216.66,588.569) 1217.041,588.569
  Top Layer w0.5: 1217.739,599.859 1218.616,600.735 1230.147,600.735 R20.1@1230.554,600.329 ; C5.2@1217.854,604.622 1219.048,603.428 1219.048,600.786 ; 1228.415,600.735 cw(c1228.415,598.418) R20.1@1230.053,600.057 ; 1229.622,600.735 cw(c1229.622,599.625) R20.1@1230.407,600.41
  Bottom Layer w0.254: v1(1187.12,590.931) 1187.12,596.697 v1(1188.542,598.119) v1(1188.542,607.111) ; v1(1188.745,586.892) 1188.745,584.454 1188.974,584.225 1196.238,584.225 1196.772,584.759 1202.792,584.759 1203.909,585.876 1213.739,585.876 1214.196,586.334 v1(1214.196,588.188) ; v1(1193.521,609.981) 1199.494,609.981 1199.53,610.017 1205.016,610.017 v1(1205.052,609.981) ; 1197.064,584.759 cw(c1197.064,584.473) 1197.266,584.675 ; 1197.263,584.675 cw(c1197.465,584.473) 1197.465,584.759 ; v1@1197.265,583.016 1197.265,584.674 ; v1(1201.09,608.838) 1202.284,608.838 1202.563,609.117 v1@1202.563,610.017 ; 1202.461,584.759 1202.461,582.93 1203.504,581.887 v1@1204.105,581.887 ; v1(1216.66,588.569) 1215.339,588.569 1214.958,588.95 1214.958,594.639 1215.415,595.097 1218.26,595.097 1218.413,594.944 1220.673,594.944 1221.003,595.274 1221.003,599.338 1220.483,599.859 v1(1217.371,599.859)
  Bottom Layer w0.5: v1(1167.917,588.823) 1167.917,580.365 1169.213,579.069 1184.097,579.069 1184.885,579.857 v1(1184.885,586.613)
  other v1: 1170.508,579.018 1204.227,581.887 1197.254,583.006 1212.875,585.8 1167.917,588.518 1202.538,610.083
VCC3.3V: 